# Altium PCB ESP32_XPID.PcbDoc
Units mm, origin at the board's own origin, x right, y up, seen from the top; angles counter-clockwise.
Board outline 60.41 x 53.72 mm, 2 copper layers (Top Layer, Bottom Layer); 26 components, 21 nets, 96 pads, 0 vias.
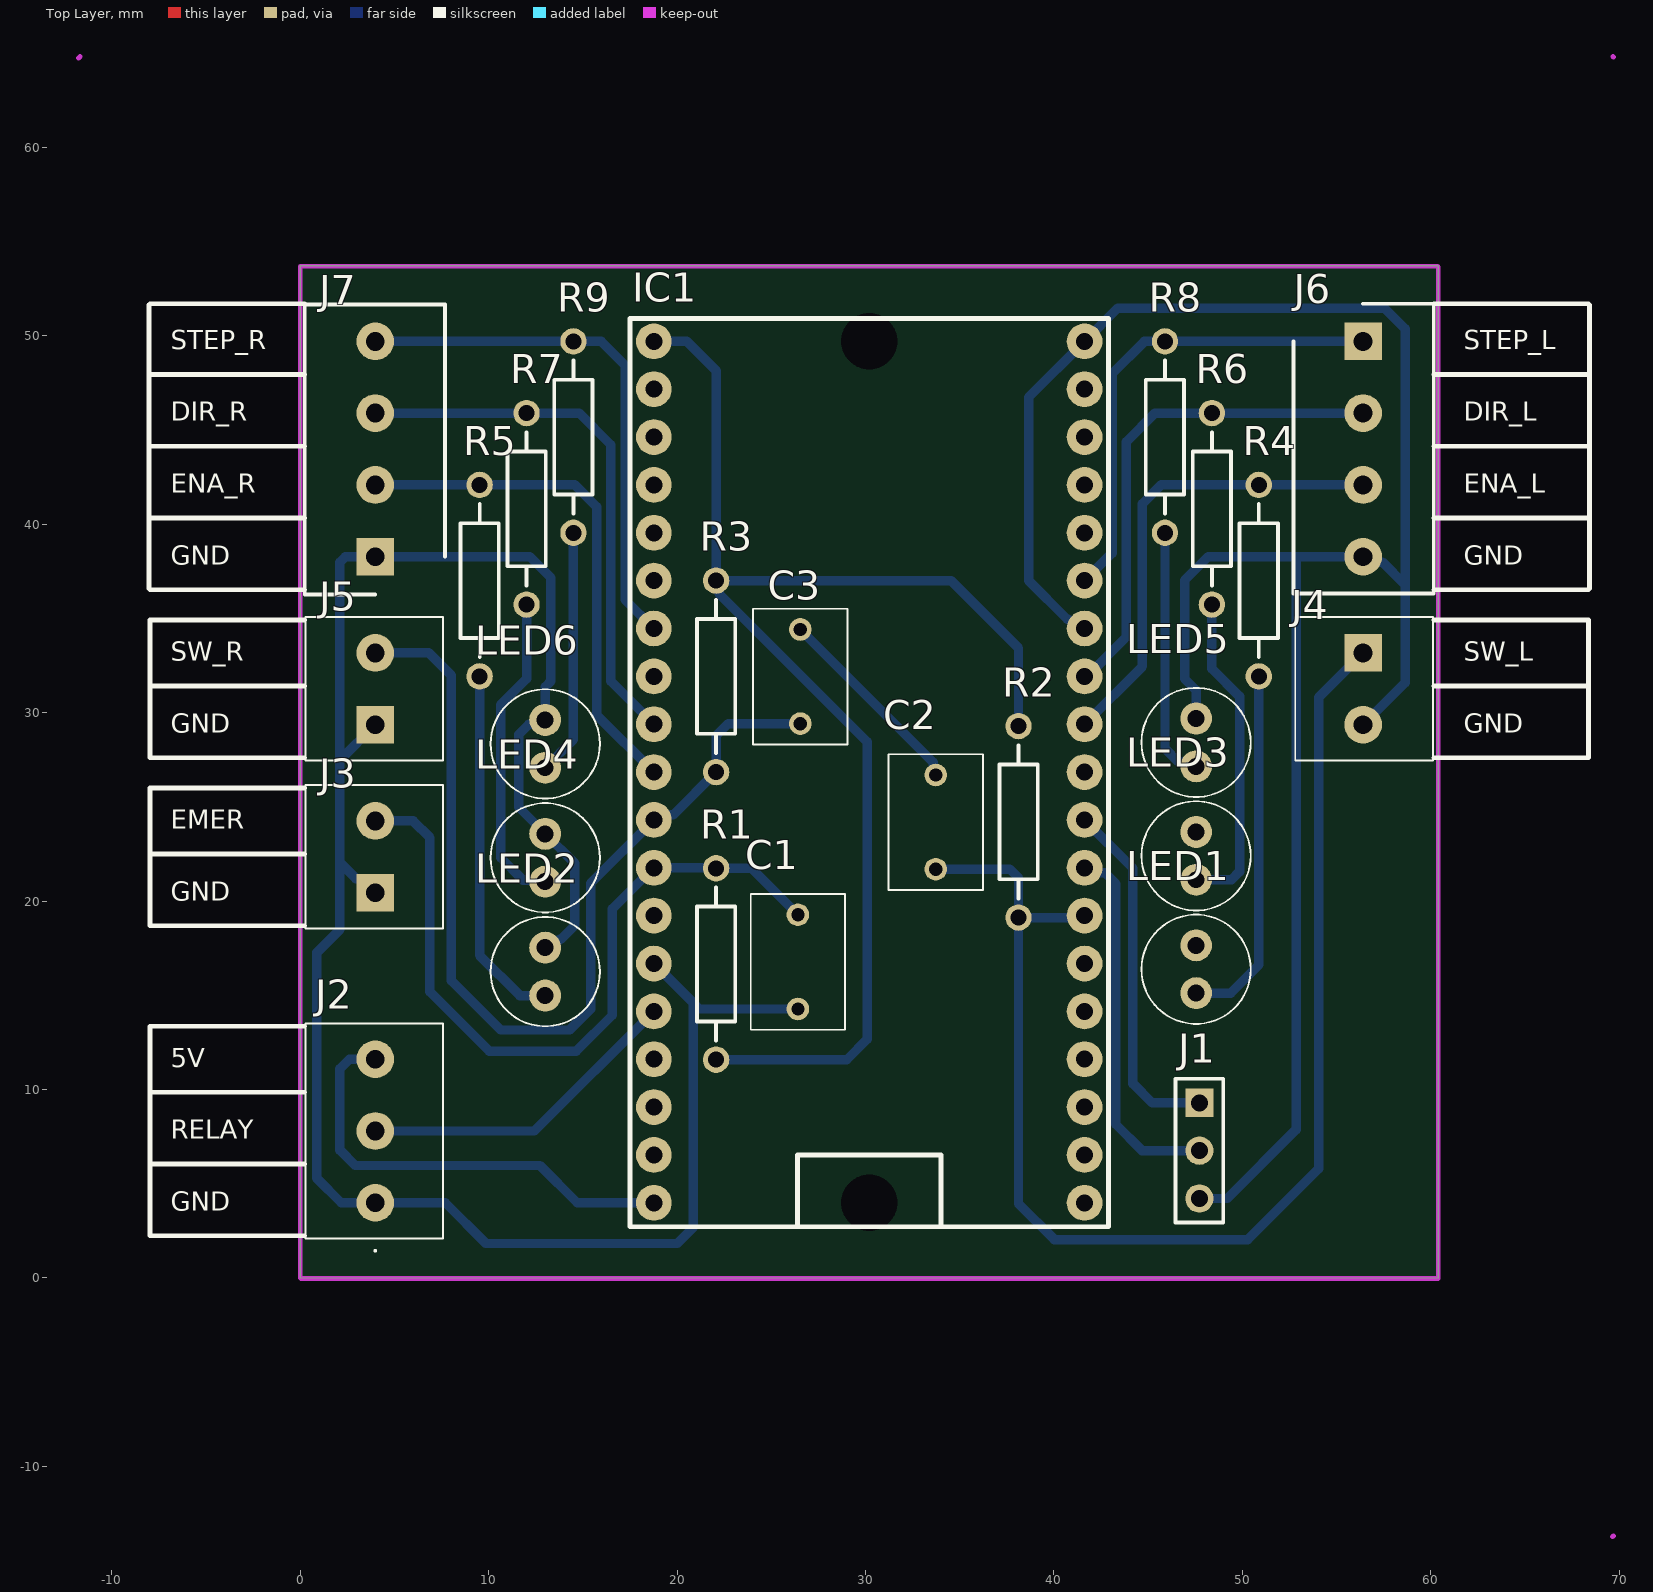
[diagram p0: Top Layer view]
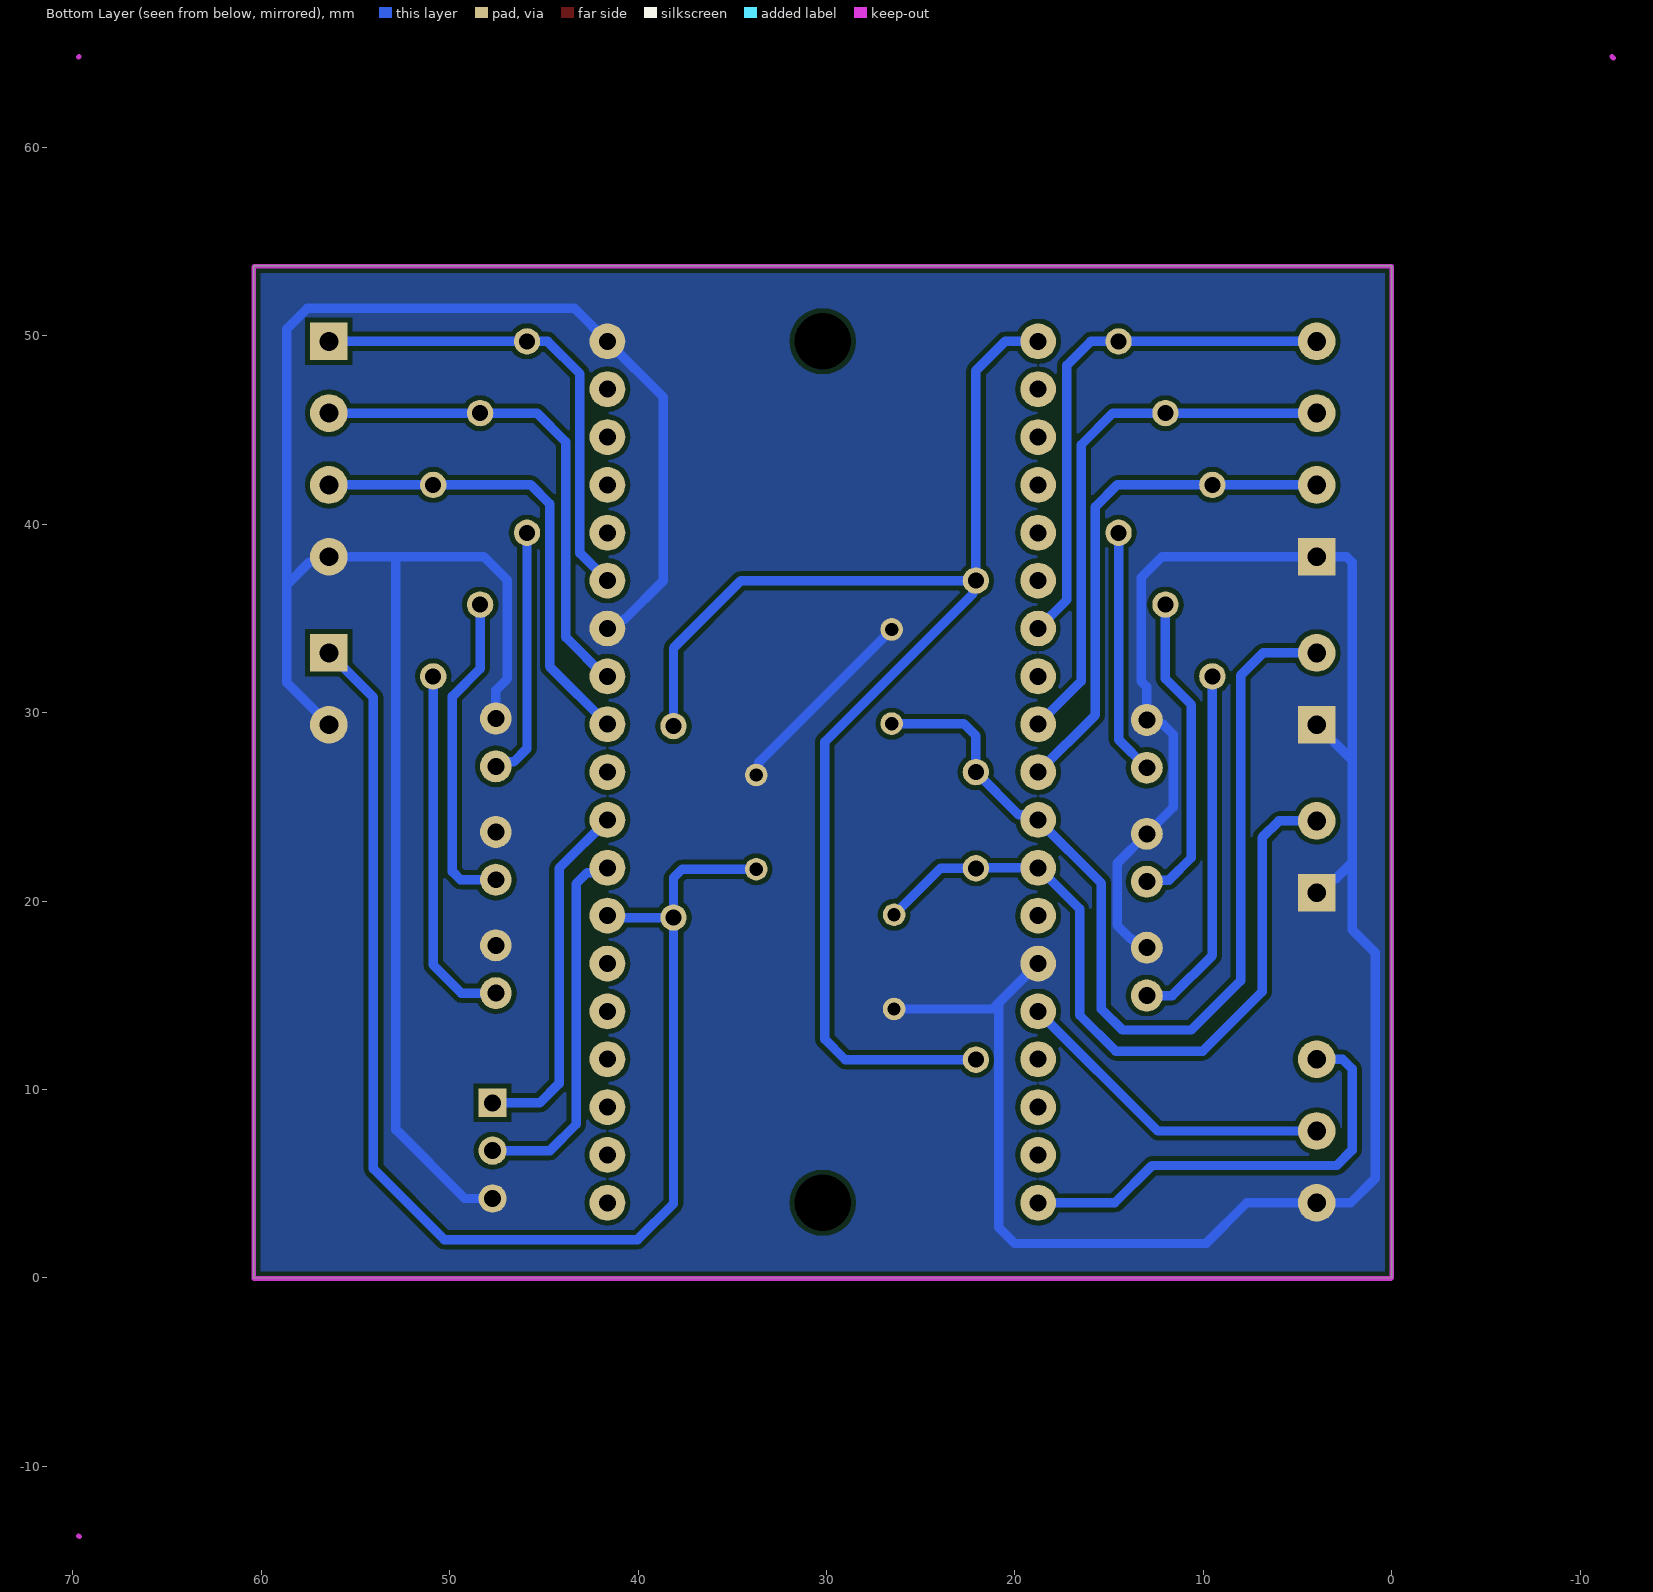
[diagram p1: Bottom Layer view, seen from below]
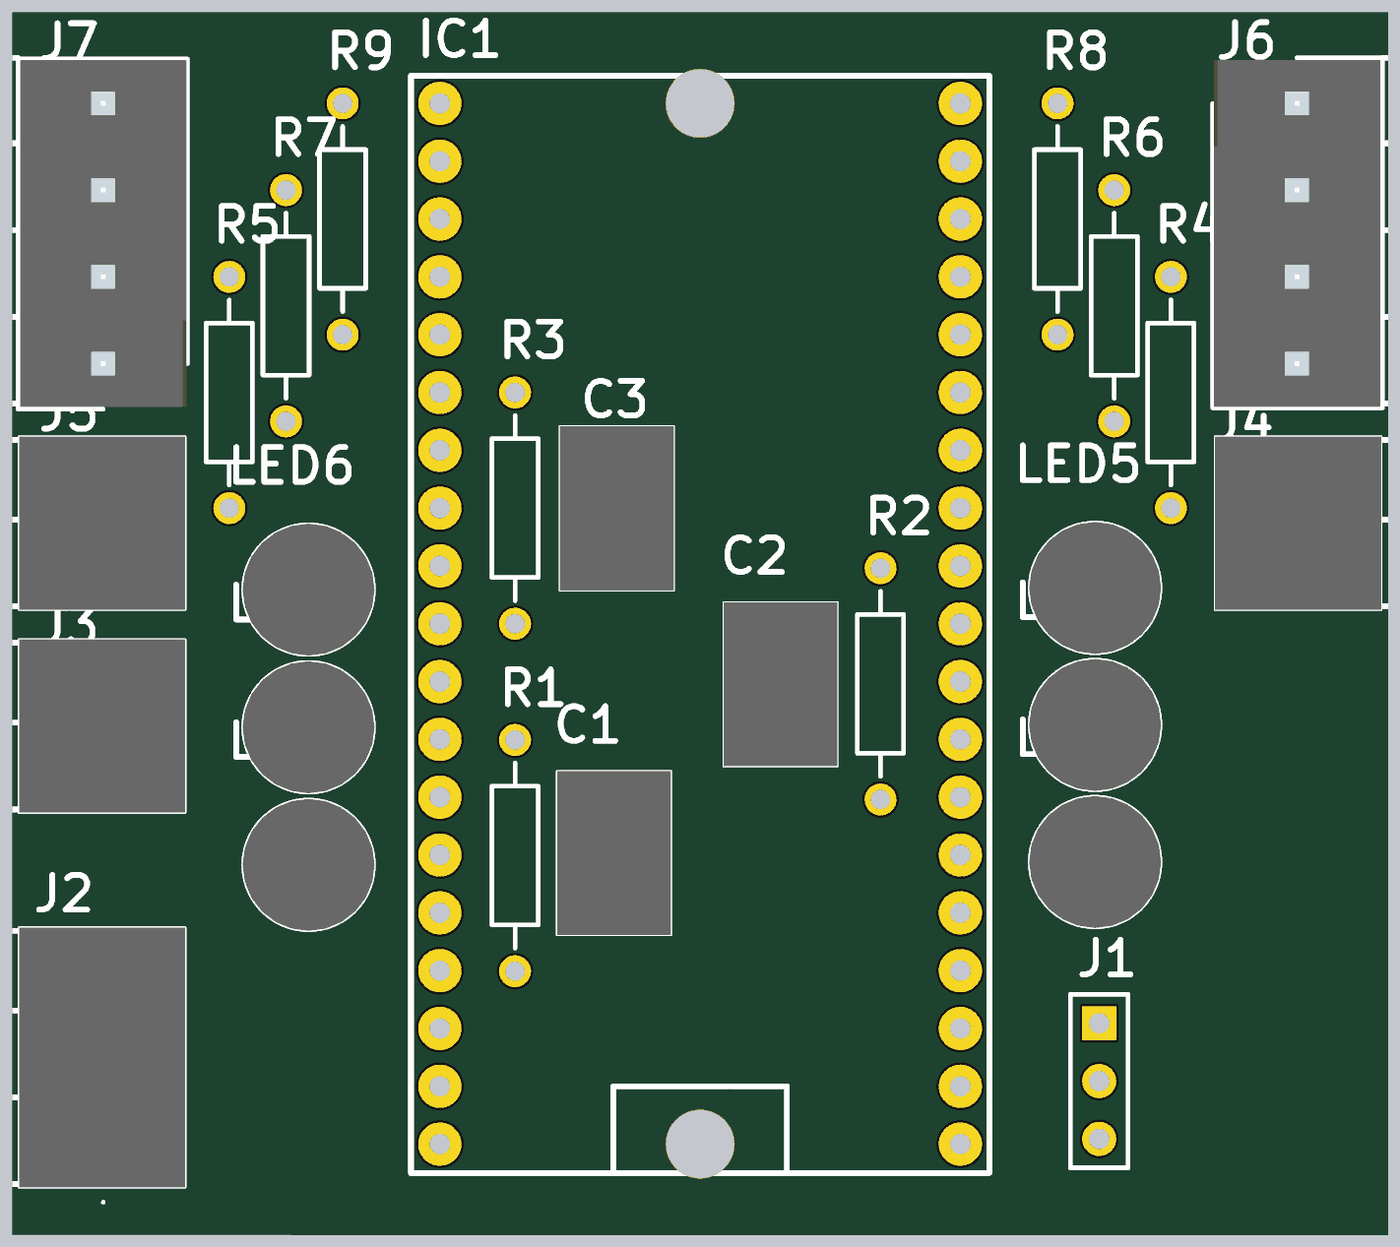
[diagram p2: 3D render of the assembled board from above, using the file's embedded part models]

## Layer stack, top to bottom
Top Solder: solder mask 0.0102, Solder Resist, Dk 3.5
Top Layer: signal copper 0.0356
Dielectric 1: dielectric 0.32, FR-4, Dk 4.8
Bottom Layer: signal copper 0.0356
Bottom Solder: solder mask 0.0102, Solder Resist, Dk 3.5

## Board outline
0,0 0,49.708 0,53.708 60.413,53.708 60.413,49.708 60.413,-0.012

## Design rules (kind name [scope] priority, off if disabled: settings)
Clearance [All] p1: gap=0.25 ignorepadtopadclearanceinfootprint=FALSE
ComponentClearance [All] p1: gap=0 collisioncheckmode=3 verticalgap=0 showdistances=FALSE
PolygonConnect [All] p1: connectstyle=Direct reliefconductorwidth=0.254 reliefentries=4 polygonreliefangle="90 Angle" airgapwidth=0.254
RoutingVias [All] p1: holewidth=0.711 width=1.27 viastyle="Through Hole" minholewidth=0.711 minwidth=1.27 maxholewidth=0.711 maxwidth=1.27
SolderMaskExpansion [All] p1: expansion=0.102
Width [All] p1: maxlimit=5 minlimit=0.254 preferedwidth=0.5
29 further rules are at their usual default settings.

## Components (designator, comment, footprint, x,y, rotation, side; value= is the part's Value field where it differs from the comment)
C1 "MKP2D031001F00KF00" MKP2D031001F00KF00 26.416,19.275 r270 top
C2 "MKP2D031001F00KF00" MKP2D031001F00KF00 33.731,26.692 r270 top
C3 "MKP2D031001F00KF00" MKP2D031001F00KF00 26.543,29.417 r90 top
IC1 "ESP32-DEVKIT" NODEMCU-32S 18.771,3.988 r0 top locked
J1 "Header 3" HDR1X3 47.727,9.296 r270 top
J2 "1727023" 1727023 3.988,3.988 r90 top
J3 "1727010" 1727010 3.988,20.447 r90 top
J4 "1727010" 1727010 56.413,33.172 r270 top
J5 "1727010" 1727010 3.988,29.362 r90 top
J6 "1727036" SHDR4W105P0X381_1X4_1523X730X865P 56.413,49.708 r270 top
J7 "1727036" SHDR4W105P0X381_1X4_1523X730X865P 3.988,38.278 r90 top
LED1 "TLCO5100" TLCO5100#1 47.549,15.113 r90 top
LED2 "TLCO5100" TLCO5100#2 13.005,14.986 r90 top
LED3 "TLCO5100" TLCO5100#1 47.549,21.133 r90 top
LED4 "TLCO5100" TLCO5100#2 13.005,21.031 r90 top
LED5 "TLCO5100" TLCO5100#1 47.549,27.153 r90 top
LED6 "TLCO5100" TLCO5100#2 13.005,27.076 r90 top
R1 "Res2" AXIAL-0.4 22.073,16.662 r90 top value=1K
R2 "Res2" AXIAL-0.4 38.125,24.206 r90 top value=1K
R3 "Res2" AXIAL-0.4 22.073,31.928 r270 top value=1K
R4 "Res2" AXIAL-0.4 50.876,37.008 r270 top value=1K
R5 "Res2" AXIAL-0.4 9.525,37.008 r270 top value=1K
R6 "Res2" AXIAL-0.4 48.387,40.818 r270 top value=1K
R7 "Res2" AXIAL-0.4 12.014,40.818 r270 top value=1K
R8 "Res2" AXIAL-0.4 45.898,44.628 r270 top value=1K
R9 "Res2" AXIAL-0.4 14.503,44.628 r270 top value=1K

## Footprints (in the part's own frame and the unit in brackets; to place one, negate y for a bottom-side part, rotate by r counter-clockwise, add the part's x,y. Pads: shape width x height; smd on the part's side, far side on the other; paste and mask are expansions set on the pad)
1727010 [mm]
  rect 2x2 hole 1: 1(0,0)
  round 2 hole 1: 2(3.81,0)
  silkscreen extent -1.9,-3.6 5.71,3.7, body extent -1.9,-3.6 5.71,3.7, height 8.75
1727023 [mm]
  round 2 hole 1: 1(0,0) 2(3.81,0) 3(7.62,0)
  silkscreen extent -2.6,-3.6 9.52,3.7, body extent -1.9,-3.6 9.52,3.7, height 8.75
AXIAL-0.4 [mm] "Axial Device, Thru-Hole; 2 Leads; 0.4 in Pin Spacing"
  round 1.4 hole 0.85: 1(-5.08,0) 2(5.08,0)
  silkscreen extent -4.06,-1.02 4.06,1.02
HDR1X3 [mm] "Connector; Header; 3 Position"
  rect 1.5x1.5 hole 0.9: 1(0,0)
  round 1.5 hole 0.9: 2(2.54,0) 3(5.08,0)
  silkscreen extent -1.27,-1.27 6.35,1.27
MKP2D031001F00KF00 [mm]
  round 1.2 hole 0.7: 1(0,0) 2(5,0)
  silkscreen extent -1.1,-2.5 6.1,2.5, body extent -1.1,-2.5 6.1,2.5, height 10.1
NODEMCU-32S [mm]
  round 1.9 hole 0.9: 1(22.86,0) 2(22.86,2.54) 3(22.86,5.08) 4(22.86,7.62) 5(22.86,10.16) 6(22.86,12.7) 7(22.86,15.24) 8(22.86,17.78) 9(22.86,20.32) 10(22.86,22.86) 11(22.86,25.4) 12(22.86,27.94) 13(22.86,30.48) 14(22.86,33.02) 15(22.86,35.56) 16(22.86,38.1) 17(22.86,40.64) 18(22.86,43.18) 19(22.86,45.72) 20(0,45.72) 21(0,43.18) 22(0,40.64) 23(0,38.1) 24(0,35.56) 25(0,33.02) 26(0,30.48) 27(0,27.94) 28(0,25.4) 29(0,22.86) 30(0,20.32) 31(0,17.78) 32(0,15.24) 33(0,12.7) 34(0,10.16) 35(0,7.62) 36(0,5.08) 37(0,2.54) 38(0,0)
  silkscreen extent -1.27,-1.27 24.13,46.93
SHDR4W105P0X381_1X4_1523X730X865P [mm]
  rect 2x2 hole 1: 1(0,0)
  round 2 hole 1: 2(3.81,0) 3(7.62,0) 4(11.43,0)
  silkscreen extent -2,-3.7 13.38,3.75, body extent -1.9,-3.65 13.33,3.65, height 8.65
TLCO5100#1 [mm]
  oval 1.7x1.68 hole 0.9: 1(0,0) 2(2.54,0)
  silkscreen extent -1.63,-2.9 4.17,2.9, body extent -1.63,-2.9 4.17,2.9, height 9.8
TLCO5100#2 [mm]
  round 1.7 hole 0.9: 1(0,0) 2(2.54,0)
  silkscreen extent -1.63,-2.9 4.17,2.9, body extent -1.63,-2.9 4.17,2.9, height 9.8

## Part data
C1 C2 C3: "Capacitor", Manufacturer_Name=WIMA, Mouser Part Number=505-MKP2D031001F00KF, Datasheet Link=http://www.mouser.com/datasheet/2/440/e_WIMA_MKP_2-1139746.pdf, Height=10mm, Manufacturer_Part_Number=MKP2D031001F00KF00, Mouser Price/Stock=https://www.mouser.com/Search/Refine.aspx?Keyword=505-MKP2D031001F00KF
IC1: library part NODE-MCU-32S, "NODE-MCU ESP32 development kit"
J1: "Header, 3-Pin", LatestRevisionDate=17-Jul-2002, LatestRevisionNote="Re-released for DXP Platform.", Publisher="Altium Limited"
J2: "Connector", Manufacturer_Name="Phoenix Contact", Mouser Part Number=651-1727023, Datasheet Link=https://www.phoenixcontact.com/online/portal/us/pxc/product_detail_page/!ut/p/z1/3VdLc9owEP4r5MCtQpLf7kwPYBjzSAjEELAvHksWjBq_YhuS5tdX5tEmTAuHDDOtPTtjaaX9dr-1VpagB5fQS4ItXwclT5MgEn3X0_xZZ9brTSQN30_VDhp0Vat3qzzg_liCj9CDXhkQ6OKqFXGSB_kP6G4KllSKjIdiSJd0JMlVP1, Height=8.65mm, Manufacturer_Part_Number=1727023, Mouser Price/Stock=https://www.mouser.co.uk/ProductDetail/Phoenix-Contact/1727023?qs=tW%2FRIINyXrcH1wMFkkEATw%3D%3D
J3 J4 J5: "Connector", Manufacturer_Name="Phoenix Contact", Mouser Part Number=651-1727010, Arrow Part Number=1727010, Arrow Price/Stock=https://www.arrow.com/en/products/1727010/phoenix-contact, Datasheet Link=https://www.phoenixcontact.com/online/portal/in?uri=pxc-oc-itemdetail:pid=1727010&library=inen&tab=1, Height=8.65mm, Manufacturer_Part_Number=1727010, Mouser Price/Stock=https://www.mouser.co.uk/ProductDetail/Phoenix-Contact/1727010?qs=JcjeNNoqGSMjtHhQoBJ7UA%3D%3D
J6 J7: "Connector", Manufacturer_Name="Phoenix Contact", Mouser Part Number=651-1727036, Arrow Part Number=1727036, Arrow Price/Stock=https://www.arrow.com/en/products/1727036/phoenix-contact, Datasheet Link=https://www.phoenixcontact.com/online/portal/gb/?uri=pxc-oc-itemdetail:pid=1727036&library=gben&pcck=P-11-01-05&tab=1&selectedCategory=ALL, Height=8.65mm, Manufacturer_Part_Number=1727036, Mouser Price/Stock=https://www.mouser.co.uk/ProductDetail/Phoenix-Contact/1727036?qs=JcjeNNoqGSPP3LoUVQFt6g%3D%3D
LED1 LED2 LED3 LED4 LED5 LED6: "LED", Manufacturer_Name=Vishay, Mouser Part Number=78-TLCO5100, Datasheet Link=http://www.vishay.com/docs/81346/tlcx510.pdf, Height=9.7mm, Manufacturer_Part_Number=TLCO5100, Mouser Price/Stock=https://www.mouser.co.uk/ProductDetail/Vishay-Semiconductors/TLCO5100?qs=RzxYCzJDjPXeuyHzs7qbMg%3D%3D
R1 R2 R3 R4 R5 R6 R7 R8 R9: "Resistor", LatestRevisionDate=17-Jul-2002, LatestRevisionNote="Re-released for DXP Platform.", PackageDescription="Axial Device, Thru-Hole; 2 Leads; 0.4 in Pin Spacing", PackageReference=AXIAL-0.4, Published=8-Jun-2000, Publisher="Altium Limited"

## Free pads (board coordinates)
  round 1.9 hole 3: ""(30.201,3.988) ""(30.201,49.708)

## Nets (pads, with @x,y where several pads share a name; then routed paths per layer and width w, separated by ;. In a path a pad name is that pad's centre, name@x,y a point inside that pad or via, vN(x,y) a via of type N, cw(c..) or ccw(c..) an arc to the next point about the centre after c; other vN are vias at no path point)
3V3: IC1.20 R1.1 R2.2 R3.1 | length 72.9
  Bottom Layer w0.5: IC1.20 20.523,49.708 22.073,48.158 R3.1 ; R1.1 29.007,11.582 30.099,12.675 30.099,28.448 22.245,36.302 22.245,36.836 R3.1 ; R2.2 38.125,33.426 34.544,37.008 R3.1
5V: IC1.38 J2.3 | length 24.2
  Bottom Layer w0.5: J2.3 2.616,11.608 2.108,11.1 2.108,6.782 2.921,5.969 12.725,5.969 14.707,3.988 IC1.38
DEBUG_RX: IC1.8 J1.2 | length 19.8
  Bottom Layer w0.5: IC1.8 41.898,21.5 42.711,21.5 43.282,20.93 43.282,8.153 44.679,6.756 J1.2
DEBUG_TX: IC1.9 J1.1 | length 19
  Bottom Layer w0.5: IC1.9 44.196,21.742 44.196,10.312 45.212,9.296 J1.1
DIR_L: IC1.12 J6.2 R6.1 | length 26.6
  Bottom Layer w0.5: IC1.12 41.758,31.928 43.84,34.011 43.84,44.374 45.364,45.898 R6.1 J6.2
DIR_R: IC1.28 J7.3 R7.1 | length 29
  Bottom Layer w0.5: J7.3 R7.1 14.808,45.898 16.485,44.221 16.485,31.674 IC1.28
EMER: C1.1 IC1.31 J3.2 R1.2 | length 40.6
  Bottom Layer w0.5: J3.2 5.994,24.257 6.883,23.368 6.883,15.189 10.033,12.04 14.656,12.04 16.561,13.945 16.561,19.583 18.745,21.768 IC1.31 22.047,21.768 R1.2 23.948,21.742 C1.1
EN_L: IC1.11 J6.3 R4.1 | length 25.1
  Bottom Layer w0.5: IC1.11 44.698,32.455 44.698,41.091 45.695,42.088 R4.1 J6.3
EN_R: IC1.29 J7.2 R5.1 | length 27.6
  Bottom Layer w0.5: J7.2 R5.1 14.58,42.088 15.735,40.933 15.735,29.884 IC1.29
GND: C1.2 C2.1 C3.2 IC1.13 IC1.19 IC1.33 J1.3 J2.1 J3.1 J4.2 J5.1 J6.4 J7.1 LED1.2 LED2.2 LED3.2 LED4.2 LED5.2 LED6.2 | length 241.6
  Bottom Layer w0.5: J3.1 3.238,21.197 2.958,21.197 2.108,22.047 ; J5.1 2.108,27.483 ; LED2.2 13.33,17.526 13.77,17.967 13.827,17.967 14.58,18.72 14.58,21.996 LED4.2 11.596,24.98 11.596,28.842 12.14,29.387 12.775,29.387 LED6.2 13.005,31.369 13.31,31.674 13.31,37.16 12.192,38.278 J7.1 2.401,38.278 2.108,37.985 2.108,27.483 ; IC1.33 20.873,14.586 ; C1.2 21.184,14.275 20.873,14.586 ; C3.2 33.597,27.363 33.597,26.826 C2.1 ; IC1.13 41.252,34.468 40.766,34.954 40.713,34.954 38.659,37.008 38.659,46.736 IC1.19 43.383,51.46 57.556,51.46 58.649,50.368 58.649,36.779 ; LED5.2 47.549,31.191 46.939,31.801 46.939,37.033 48.184,38.278 52.857,38.278 ; J1.3 49.2,4.216 52.857,7.874 52.857,38.278 ; J4.2 58.649,31.598 58.649,36.779 ; 2.108,22.047 2.108,18.491 0.889,17.272 0.889,5.283 2.184,3.988 J2.1 7.696,3.988 9.855,1.829 20.015,1.829 20.873,2.686 20.873,14.586 ; 2.108,22.047 2.108,27.483 ; 52.857,38.278 J6.4 56.7,37.991 57.437,37.991 58.649,36.779
M_RELAY: IC1.34 J2.2 | length 17.4
  Bottom Layer w0.5: J2.2 12.421,7.798 IC1.34
NetLED1_1: LED1.1 R4.2 | length 19.3
  Bottom Layer w0.5: LED1.1 49.378,15.113 50.876,16.612 R4.2
NetLED2_1: LED2.1 R5.2 | length 19.2
  Bottom Layer w0.5: R5.2 9.525,17.12 11.659,14.986 LED2.1
NetLED3_1: LED3.1 R6.2 | length 17.3
  Bottom Layer w0.5: LED3.1 49.428,21.133 49.86,21.565 49.86,30.861 48.387,32.334 R6.2
NetLED4_1: LED4.1 R7.2 | length 16.9
  Bottom Layer w0.5: R7.2 12.014,31.801 10.643,30.429 10.643,22.301 11.827,21.116 12.92,21.116 LED4.1
NetLED5_1: LED5.1 R8.2 | length 13.5
  Bottom Layer w0.5: R8.2 45.898,28.092 46.602,27.388 47.313,27.388 LED5.1
NetLED6_1: LED6.1 R9.2 | length 13.1
  Bottom Layer w0.5: LED6.1 14.503,28.575 R9.2
STEP_L: IC1.14 J6.1 R8.1 | length 25.6
  Bottom Layer w0.5: IC1.14 43.09,38.468 43.09,47.993 44.806,49.708 R8.1 J6.1
STEP_R: IC1.26 J7.4 R9.1 | length 28.4
  Bottom Layer w0.5: J7.4 R9.1 15.977,49.708 17.247,48.438 17.247,35.992 IC1.26
STOP_SW_L: C2.2 IC1.7 J4.1 R2.1 | length 72.1
  Bottom Layer w0.5: C2.2 37.668,21.692 38.125,21.234 R2.1 ; IC1.7 41.529,19.126 R2.1 ; J4.1 54.051,30.81 54.051,5.791 50.292,2.032 40.03,2.032 38.125,3.937 R2.1
STOP_SW_R: C3.1 IC1.30 J5.2 R3.2 | length 52.1
  Bottom Layer w0.5: J5.2 6.833,33.172 8.026,31.979 8.026,15.773 10.643,13.157 14.3,13.157 15.418,14.275 15.418,20.955 IC1.30 19.038,24.576 19.8,24.576 R3.2 22.073,28.778 22.711,29.417 C3.1
pads on no net: IC1.1 IC1.2 IC1.3 IC1.4 IC1.5 IC1.6 IC1.10 IC1.15 IC1.16 IC1.17 IC1.18 IC1.21 IC1.22 IC1.23 IC1.24 IC1.25 IC1.27 IC1.32 IC1.35 IC1.36 IC1.37

## Polygon pours and split planes (outlines as drawn)
GND on Bottom Layer "Bottom Layer-GND 1" (solid, pour order 1): 0,53.696 0.013,53.683 60.389,53.683 60.389,-0.013 60.376,0 0,0

## Keep-outs
Keep-Out Layer:
  lines w0.254: -11.76,64.745 -11.684,64.821 ; 69.647,-13.741 69.698,-13.691 ; 69.672,64.821 69.698,64.795 ; 0,0 0.025,-0.025 60.401,-0.025 60.401,53.67 60.376,53.696 0,53.696 0,0

## Silkscreen, mask and mechanical layers (free items; w line width, h text height)
Top Overlay:
  lines w0.254: -8.026,36.576 -8.026,51.65 -7.969,51.708 0.238,51.708 ; -7.976,9.855 0.238,9.855 ; -7.976,22.504 0.238,22.504 ; -7.976,31.42 0.238,31.42 ; -7.976,36.525 0.238,36.525 ; -7.976,40.335 0.238,40.335 ; -7.976,44.145 0.238,44.145 ; -7.976,47.955 0.238,47.955 ; 0.238,2.235 -7.976,2.235 -7.976,6.045 ; 0.238,6.045 -7.976,6.045 ; 0.238,13.36 -7.976,13.36 -7.976,6.045 ; 0.238,18.694 -7.976,18.694 -7.976,26.01 0.238,26.01 ; 0.238,27.61 -7.976,27.61 -7.976,34.925 0.238,34.925 ; 60.163,27.61 68.377,27.61 68.377,34.925 60.163,34.925 ; 60.163,31.42 68.377,31.42 ; 60.163,36.525 68.377,36.525 ; 60.163,40.335 68.377,40.335 ; 60.163,44.145 68.377,44.145 ; 60.163,47.955 68.377,47.955 ; 60.163,51.708 68.37,51.708 68.428,51.65 68.428,36.576
  text "STEP_R" at -6.858,49.291 h1
  text "STEP_L" at 61.747,49.291 h1
  text "DIR_R" at -6.858,45.481 h1
  text "DIR_L" at 61.747,45.481 h1
  text "ENA_R" at -6.858,41.671 h1
  text "ENA_L" at 61.747,41.671 h1
  text "GND" at -6.858,37.861 h1
  text "GND" at 61.747,37.861 h1
  text "SW_R" at -6.858,32.756 h1
  text "SW_L" at 61.747,32.756 h1
  text "GND" at -6.858,28.946 h1
  text "GND" at 61.747,28.946 h1
  text "EMER" at -6.858,23.84 h1
  text "GND" at -6.858,20.03 h1
  text "5V" at -6.858,11.191 h1
  text "RELAY" at -6.858,7.381 h1
  text "GND" at -6.858,3.571 h1
Mechanical 13:
  lines w0.254: -8.012,0.013 -0.012,0.013 ; -8,0.025 -8,53.696 0,53.696 ; -0.012,3.988 3.988,3.988 ; 0,-0.012 3.976,-0.012 ; 0,0 0,49.708 ; 3.976,3.988 3.976,-0.012 ; 3.988,15.342 3.988,20.447 ; 3.988,33.172 3.988,38.278 ; 4,49.708 0,49.708 ; 9.525,42.088 12.014,44.577 12.014,45.898 12.014,47.219 14.503,49.708 ; 18.771,3.988 41.631,3.988 ; 50.876,42.088 48.387,44.577 48.387,45.898 48.387,47.219 45.898,49.708 ; 56.413,33.172 56.413,38.278 ; 56.426,49.708 56.426,53.708 ; 60.401,53.67 68.401,53.67 68.401,0 ; 68.413,-0.012 60.413,-0.012 ; 0,49.708 0,53.708 3.988,53.708 ; 3.976,-0.012 60.413,-0.012 ; 3.988,53.708 60.413,53.708 60.413,49.708 ; 3.988,53.708 3.988,49.708 14.503,49.708 ; 14.503,49.708 18.771,49.708 41.631,49.708 45.898,49.708 ; 45.898,49.708 56.413,49.708 60.413,49.708 ; 60.413,-0.012 60.413,49.708

## Dimensions
30.201,3.988 to 0,0 on Mechanical 13
30.201,3.988 to 60.413,-0.012 on Mechanical 13
30.201,49.708 to 30.201,3.988 on Mechanical 13
30.201,3.988 to 3.976,-0.012 on Mechanical 13
30.201,49.708 to 3.988,53.708 on Mechanical 13
60.389,53.683 to 60.401,-0.025 on Mechanical 13
0,0 to 60.376,0 on Mechanical 13